# Altium PCB watch_PCB2.PcbDoc
Units mm, origin at the board's own origin, x right, y up, seen from the top; angles counter-clockwise.
Board outline 80 x 45 mm, 2 copper layers (Top Layer, Bottom Layer); 71 components, 49 nets, 254 pads, 73 vias.
Unrouted connection lines stored in the file: 6.
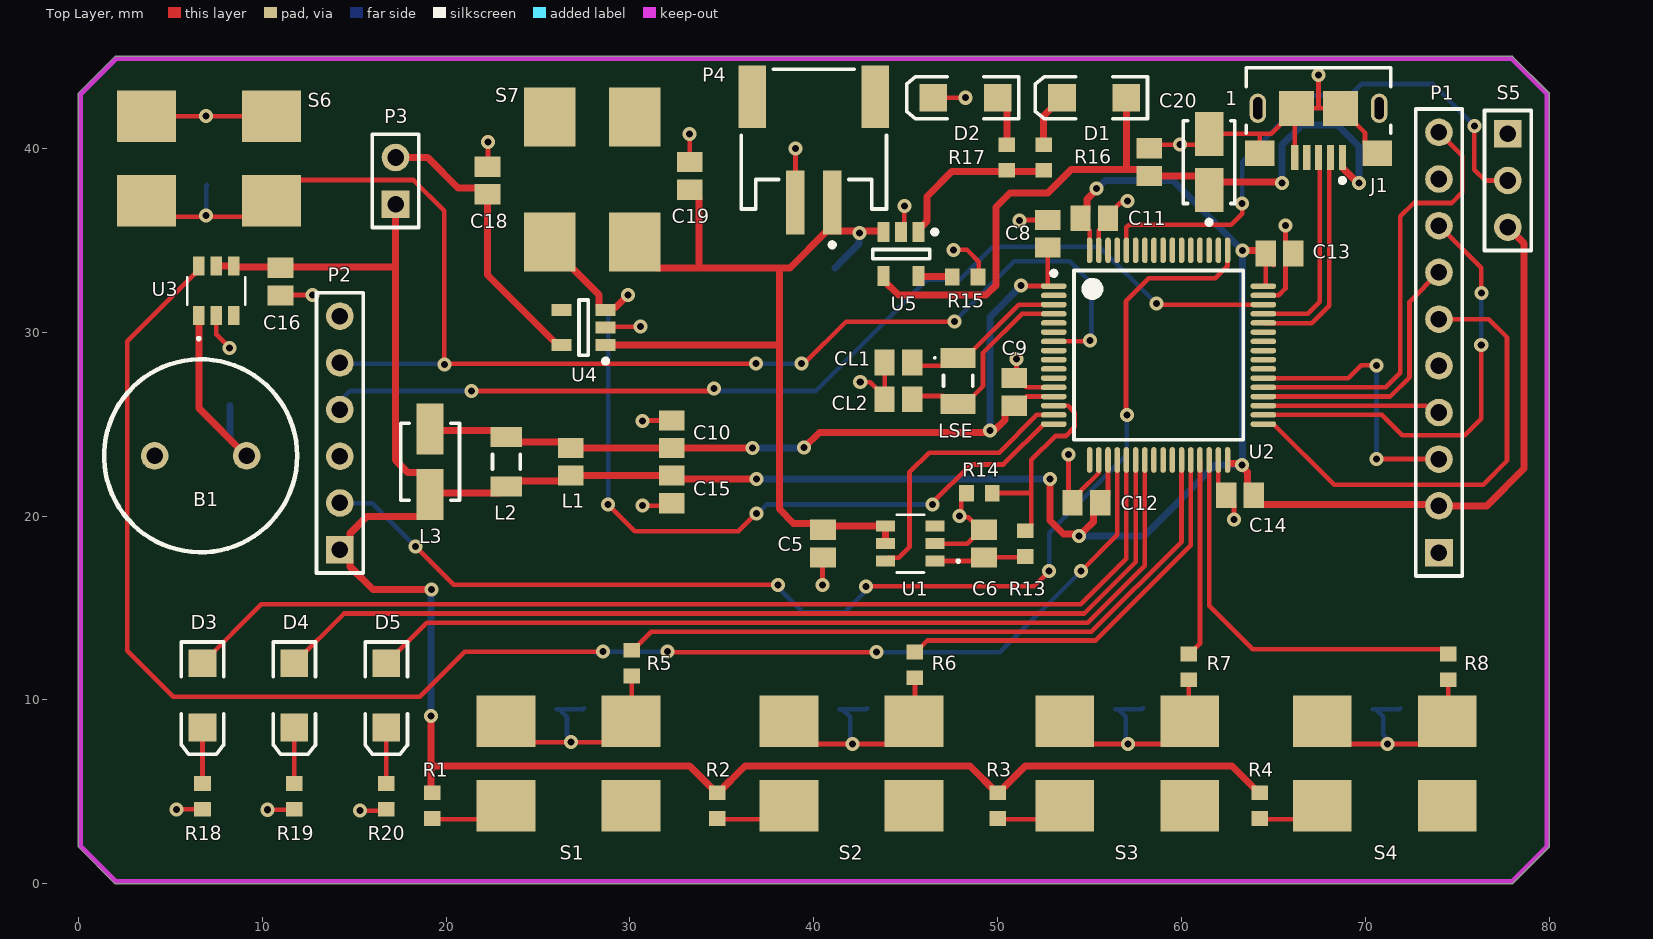
[diagram p0: Top Layer view]
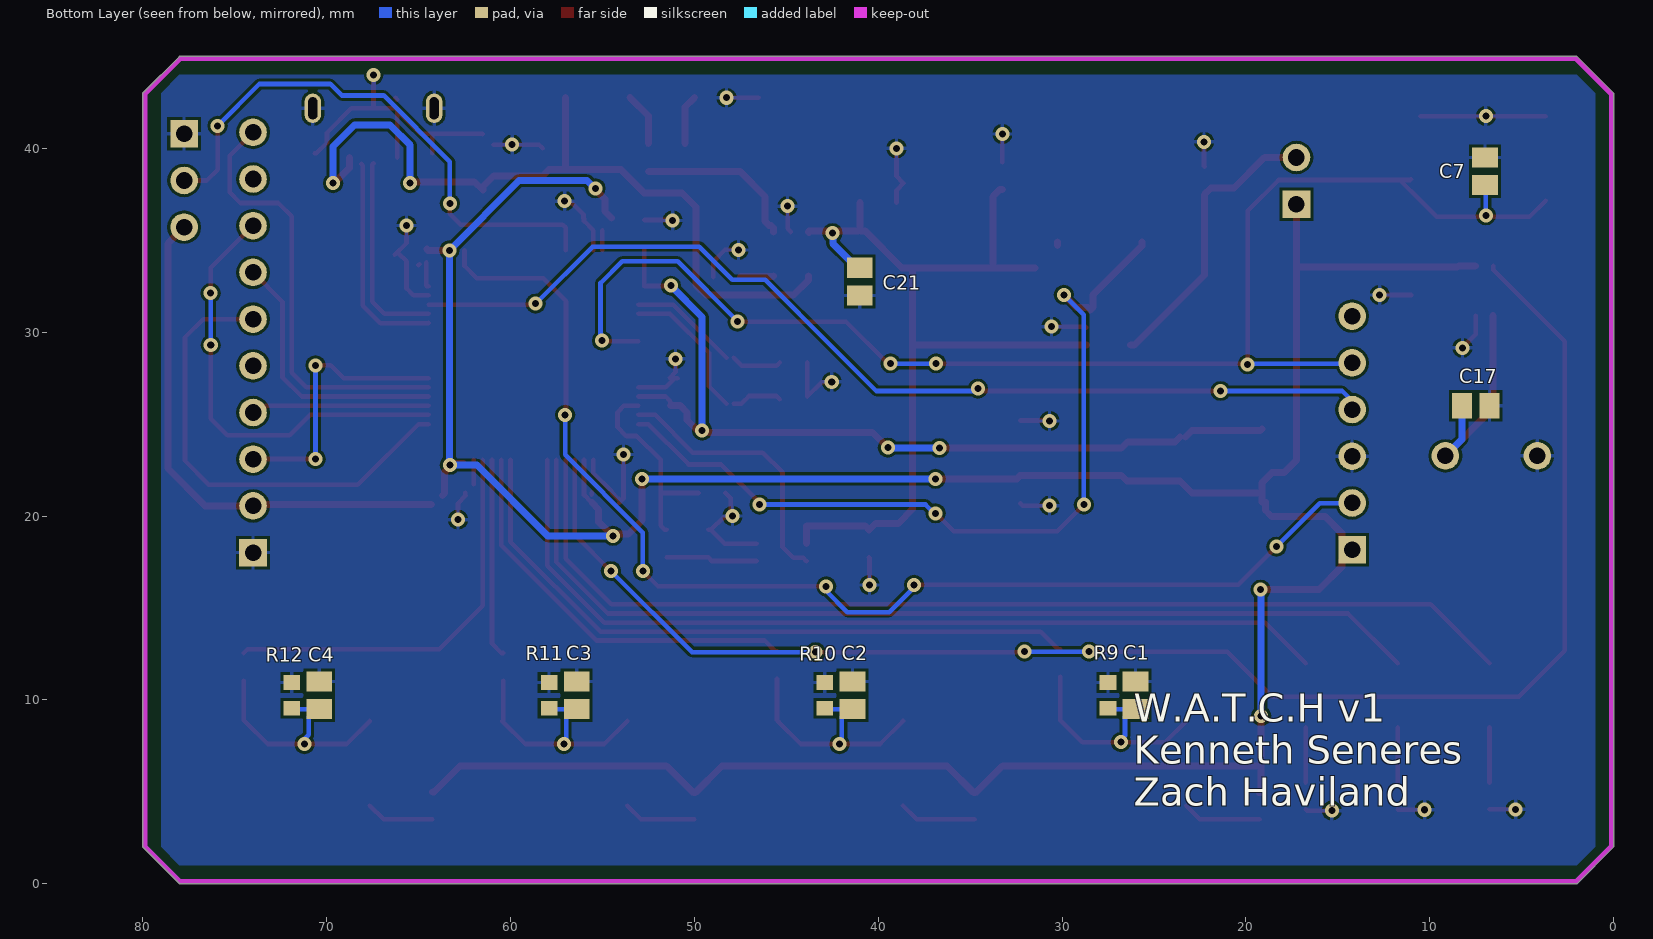
[diagram p1: Bottom Layer view, seen from below]

## Layer stack, top to bottom
Top Solder: solder mask 0.0102, Solder Resist, Dk 3.5
Top Layer: signal copper 0.0356
Dielectric 1: dielectric 0.32, FR-4, Dk 4.8
Bottom Layer: signal copper 0.0356
Bottom Solder: solder mask 0.0102, Solder Resist, Dk 3.5

## Board outline
0,2 2,0 78,0 80,2 80,43 78,45 2,45 0,43

## Design rules (kind name [scope] priority, off if disabled: settings)
BoardOutlineClearance [All] p1: gap=0.381 ignorepadtopadclearanceinfootprint=FALSE
Clearance [All] p1: gap=0.152 ignorepadtopadclearanceinfootprint=FALSE
ComponentClearance [All] p1: gap=0.025 collisioncheckmode=3 verticalgap=0.025 showdistances=FALSE
DiffPairsRouting [All] p1: maxlimit=10 minlimit=0.152 mostfreqgap=0.203 toplayer_minwidth=0.152 toplayer_maxwidth=0.381 toplayer_prefwidth=0.203 bottomlayer_minwidth=0.152 bottomlayer_maxwidth=0.381 bottomlayer_prefwidth=0.203 maxuncoupledlength=12.7
HoleSize [All] p1: absolutevalues=TRUE maxlimit=6.731 minlimit=0.33 maxpercent=80.000 minpercent=20.000
HoleToHoleClearance [All] p1: gap=0.254 allowstackedmicrovias=FALSE
MinimumAnnularRing [All] p1: minimumring=0.178
MinimumSolderMaskSliver [All] p1: minsoldermaskwidth=0
PlaneClearance [All] p1: clearance=0.254
PlaneConnect [All] p1: planeconnectstyle=Direct reliefexpansion=0.406 reliefentries=4 reliefconductorwidth=0.152 reliefairgap=0.152
PolygonConnect [All] p1: connectstyle=Relief reliefconductorwidth=0.203 reliefentries=4 polygonreliefangle="90 Angle" airgapwidth=0.152
RoutingCorners [All] p1: cornerstyle=45-Degree minsetback=1.25 maxsetback=1.25
RoutingVias RoutingVias_3 [IsVia] p1: holewidth=0.381 width=0.762 viastyle="Through Hole" minholewidth=0.381 minwidth=0.762 maxholewidth=0.381 maxwidth=0.762
RoutingVias RoutingVias_2 [IsVia] p2: holewidth=0.762 width=0.381 viastyle="Through Hole" minholewidth=0.762 minwidth=0.381 maxholewidth=0.762 maxwidth=0.381
RoutingVias RoutingVias_1 [IsVia] p3: holewidth=0.381 width=0.762 viastyle="Through Hole" minholewidth=0.711 minwidth=1.27 maxholewidth=0.711 maxwidth=1.27
RoutingVias [All] p4: holewidth=0.381 width=0.762 viastyle="Through Hole" minholewidth=0.33 minwidth=0.686 maxholewidth=2.54 maxwidth=2.896
SilkToSilkClearance [All] p1: silktosilkclearance=0
SilkToSolderMaskClearance [IsPad] p1: minsilkscreentomaskgap=0.152 clearancetoexposedcopper=TRUE
SolderMaskExpansion [All] p1: expansion=0.075 istentingtop=FALSE
Width [All] p1: maxlimit=10.16 minlimit=0.152 preferedwidth=0.203
20 further rules are at their usual default settings.

## Classes and differential pairs
component class power_supply: 1 C18 C19 C20 C21 D1 D2 J1 P3 P4 R15 R16 R17 S7 U4 U5
component class Motor_Driver_Schematic: B1 C16 C17 U3
component class MCU_Connections: C5 C6 C7 C8 C9 C10 C11 C12 C13 C14 C15 CL1 CL2 D3 D4 D5 L1 L2 L3 LSE P1 P2 R13 R14 R18 R19 R20 S5 S6 U1 U2 y
component class Button_connections: C1 C2 C3 C4 R1 R2 R3 R4 R5 R6 R7 R8 R9 R10 R11 R12 S1 S2 S3 S4
differential pair USB_D: +USB_D_P -USB_D_N

## Components (designator, comment, footprint, x,y, rotation, side; value= is the part's Value field where it differs from the comment)
1 "SMAJ5.0A-E3/5A" VISH-DO-214AC-2_N 61.5,39.25 r90 top
B1 "Motor: 316040004" RB5-10.5 6.65,23.275 r180 top
C1 "Cap" C0805 26,10.25 r270 bottom value=100nF
C2 "Cap" C0805 41.4,10.25 r270 bottom value=100nF
C3 "Cap" C0805 56.4,10.25 r270 bottom value=100nF
C4 "Cap" C0805 70.4,10.25 r270 bottom value=100nF
C5 "Cap" C0805 40.5,18.5 r90 top value=1uF
C6 "Cap" C0805 49.25,18.5 r270 top value=100nF
C7 "Cap" C0805 7,38.75 r90 bottom value=100nF
C8 "Cap" C0805 52.725,35.35 r270 top value=1uF
C9 "Cap" C0805 50.9,26.75 r270 top value=1uF
C10 "Cap" C0805 32.275,24.45 r270 top value=10nF
C11 "Cap" C0805 55.25,36.2 r180 top value=100nF
C12 "Cap" C0805 54.825,20.725 r0 top value=100nF
C13 "Cap" C0805 65.325,34.275 r180 top value=100nF
C14 "Cap" C0805 63.175,21.125 r0 top value=100nF
C15 "Cap" C0805 32.275,21.45 r90 top value=10uF
C16 "Cap" C0805 11,32.75 r90 top value=1uF
C17 "Cap" C0805 7.5,26 r0 bottom value=100nF
C18 "Cap" C0805 22.25,38.25 r270 top value=1uF
C19 "Cap" C0805 33.25,38.5 r270 top value=1uF
C20 "Cap" C0805 58.25,39.25 r270 top value=4.7uF
C21 "Cap" C0805 41,32.75 r90 bottom value=4.7uF
CL1 "Cap" C0805 44.6,28.35 r0 top value=TBD
CL2 "Cap" C0805 44.6,26.35 r0 top value=TBD
D1 "Orange LED" 3.2X1.6X1.1 55.25,42.75 r180 top
D2 "Green LED" 3.2X1.6X1.1 48.25,42.75 r180 top
D3 "Green LED" 3.2X1.6X1.1 6.75,10.25 r270 top
D4 "Orange LED" 3.2X1.6X1.1 11.75,10.25 r270 top
D5 "Green LED" 3.2X1.6X1.1 16.75,10.25 r270 top
J1 "10118193-0001LF" FCI-10118193-0001LF-5_V 67.45,40.825 r180 top
L1 "" C0805 26.775,22.95 r270 top
L2 "" C1206 23.275,22.95 r270 top
L3 "35F0121-0SR-10" LIRD-35F0121-0SR-10_V 19.125,22.95 r270 top
LSE "CM315D32768HZFT" CMHT-CM315D-2_V 47.85,27.35 r270 top
P1 "LCD receptile" HDR1X10 74,18.01 r90 top
P2 "SWD connecctor" HDR1X6 14.225,18.17 r90 top
P3 "Header 2" HDR1X2 17.25,36.96 r90 top
P4 "JST-PH connector" "JST- S2B-PH-SM4-TB(LF)(SN)-2_V" 40,40.5 r180 top
R1 "Res3" 1608[0603] 19.25,4.25 r90 top value=100
R2 "Res3" 1608[0603] 34.75,4.25 r90 top value=100
R3 "Res3" 1608[0603] 50,4.25 r90 top value=100
R4 "Res3" 1608[0603] 64.25,4.25 r90 top value=100
R5 "Res3" 1608[0603] 30.1,12 r270 top value=10k
R6 "Res3" 1608[0603] 45.5,11.9 r270 top value=10k
R7 "Res3" 1608[0603] 60.4,11.8 r270 top value=10k
R8 "Res3" 1608[0603] 74.5,11.8 r270 top value=10k
R9 "Res3" 1608[0603] 27.5,10.25 r270 bottom value=10k
R10 "Res3" 1608[0603] 42.9,10.25 r270 bottom value=10k
R11 "Res3" 1608[0603] 57.9,10.25 r270 bottom value=10k
R12 "Res3" 1608[0603] 71.9,10.25 r270 bottom value=10k
R13 "Res3" 1608[0603] 51.5,18.5 r270 top value=40K
R14 "Res3" 1608[0603] 49,21.25 r0 top value=100K
R15 "Res3" 1608[0603] 48.225,33 r180 top value=10K
R16 "Res3" 1608[0603] 52.5,39.5 r90 top value=470
R17 "Res3" 1608[0603] 50.5,39.5 r270 top value=470
R18 "Res3" 1608[0603] 6.75,4.75 r90 top value=470
R19 "Res3" 1608[0603] 11.75,4.75 r90 top value=470
R20 "Res3" 1608[0603] 16.75,4.75 r90 top value=470
S1 "SW-DPST" PCBComponent_1 27.85,7.75 r0 top
S2 "SW-DPST" PCBComponent_1 43.25,7.75 r0 top
S3 "SW-DPST" PCBComponent_1 58.25,7.75 r0 top
S4 "SW-DPST" PCBComponent_1 72.25,7.75 r0 top
S5 "SW-SPDT" HDR1X3 77.75,40.79 r270 top
S6 "SW-DPST" PCBComponent_1 5.9,38.25 r180 top
S7 "SW-DPST" PCBComponent_1 26.75,39.5 r90 top
U1 "Part Number: TPS22860DBVR" DBV0006A_N 45.25,18.5 r180 top value=Value
U2 "STM32L073RZT6" STM-LQFP64_M 58.75,28.75 r0 top
U3 "Part Number: TPS22860DBVR" DBV0006A_N 7.5,32.25 r90 top value=Value
U4 "LD39015M33R" SOT23-5L_N 27.475,30.25 r180 top
U5 "MCP73831T-2ATI/OT" SOT-23-OT5_N 44.75,34.25 r270 top

## Footprints (in the part's own frame and the unit in brackets; to place one, negate y for a bottom-side part, rotate by r counter-clockwise, add the part's x,y. Pads: shape width x height; smd on the part's side, far side on the other; paste and mask are expansions set on the pad)
3.2X1.6X1.1 [mm] "SMT LED; 2 Flat Leads"
  rect 1.5x1.5 smd: 1(-1.75,0) 2(1.75,0)
  silkscreen extent -2.9,-1.15 3.2,1.15
1608[0603] [mm] "Chip Capacitor, Body 1.6x0.8mm, IPC High Density"
  rect 0.8x0.9 smd: 1(-0.7,0) 2(0.7,0)
  body extent -0.87,-0.48 0.87,0.48, height 1.3
C0805 [mm] "Chip Capacitor, Body 2.0x1.3mm, IPC High Density"
  rect 1.1x1.4 smd: 1(-0.75,0) 2(0.75,0)
  body extent -1.1,-0.72 1.1,0.72, height 1.4
C1206 [mm] "Chip Capacitor, Body 3.2x1.6mm, IPC High Density"
  rect 1.1x1.7 smd: 1(-1.35,0) 2(1.35,0)
  silkscreen extent -0.4,-0.75 0.4,0.75, body extent -1.7,-0.9 1.7,0.9, height 1.3
CMHT-CM315D-2_V [mm] "SMD, 2-Leads, Body 1.60x3.30mm, Pitch 2.50mm"
  rect 1.1x1.9 smd: 1(-1.25,0) 2(1.25,0)
  silkscreen extent -1.3,-1.32 0.3,0.8, body extent -1.65,-0.8 1.65,0.8, height 0.9
DBV0006A_N [mil]
  rect 41x24 smd paste+0 mask+3: 1(-53.15,37.4) 2(-53.15,0) 3(-53.15,-37.4) 4(53.15,-37.4) 5(53.15,0) 6(53.15,37.4)
  silkscreen extent -105,-62 29,62, body extent 0,0 10,10, height 10
FCI-10118193-0001LF-5_V [mm] "Micro, USB-B, 5-Leads, Body 7.86x5.05mm, Pitch 0.65 mm"
  rect 0.4x1.35 smd: 1(-1.3,1.325) 2(-0.65,1.325) 3(0,1.325) 4(0.65,1.325) 5(1.3,1.325)
  rect 1.6x1.4 smd: 6(-3.2,1.1) 7(3.2,1.1)
  rect 1.9x1.9 smd: 8(-1.2,-1.35) 9(1.2,-1.35)
  oval 0.9x1.6 hole 0.5 slot 1.2 at 90 deg: 10(-3.3,-1.35) 11(3.3,-1.35)
  silkscreen extent -3.93,-3.55 3.93,2.7, body extent -3.93,-4.16 3.93,1.5, height 2.83
HDR1X2 [mm] "Connector; Header; 2 Position"
  rect 1.5x1.5 hole 0.9: 1(0,0)
  round 1.5 hole 0.9: 2(2.54,0)
  silkscreen extent -1.27,-1.27 3.81,1.27
HDR1X3 [mm] "Connector; Header; 3 Position"
  rect 1.5x1.5 hole 0.9: 1(0,0)
  round 1.5 hole 0.9: 2(2.54,0) 3(5.08,0)
  silkscreen extent -1.27,-1.27 6.35,1.27
HDR1X6 [mm] "Connector; Header; 6 Position"
  rect 1.5x1.5 hole 0.9: 1(0,0)
  round 1.5 hole 0.9: 2(2.54,0) 3(5.08,0) 4(7.62,0) 5(10.16,0) 6(12.7,0)
  silkscreen extent -1.27,-1.27 13.97,1.27
HDR1X10 [mm] "Connector; Header; 10 Position"
  rect 1.5x1.5 hole 0.9: 1(0,0)
  round 1.5 hole 0.9: 2(2.54,0) 3(5.08,0) 4(7.62,0) 5(10.16,0) 6(12.7,0) 7(15.24,0) 8(17.78,0) 9(20.32,0) 10(22.86,0)
  silkscreen extent -1.27,-1.27 24.13,1.27
"JST- S2B-PH-SM4-TB(LF)(SN)-2_V" [mm] "SMD, 2-Leads, Body 7.9x7.6mm, Pitch 2mm"
  rect 1x3.5 smd: 1(-1,3.45) 2(1,3.45)
  rect 1.5x3.4 smd: MP1(-3.35,-2.3) MP2(3.35,-2.3)
  silkscreen extent -3.95,-3.8 3.95,5.87, body extent -3.95,-3.8 3.95,4.8, height 5.6
LIRD-35F0121-0SR-10_V [mm] "Molded Inductor, 2-Leads, Body 4.16x3.13mm"
  rect 2.77x1.47 smd: 1(-1.79,0) 2(1.79,0)
  silkscreen extent -2.1,-1.6 2.1,1.6, body extent -2.3,-1.56 2.3,1.57, height 3.05
PCBComponent_1 [mm]
  rect 3.2x2.8 smd: 1(-4.6,1.1) 2(2.2,-3.5) 3(2.2,1.1) 4(-4.6,-3.5)
RB5-10.5 [mm] "Capacitor (Radial); 2 Leads"
  round 1.5 hole 0.9: 1(-2.5,0) 2(2.5,0)
  silkscreen extent -5.25,-5.25 5.25,5.25
SOT23-5L_N [mm] "SOT23, 5-Leads, Body 2.9x1.6mm, Pitch 0.95mm, Lead Span 2.8mm, IPC Medium Density"
  rect 1.1x0.65 smd: 1(-1.2,0.95) 2(-1.2,0) 3(-1.2,-0.95) 4(1.2,-0.95) 5(1.2,0.95)
  silkscreen extent -1.33,-1.5 0.25,1.95, body extent -0.87,-1.5 0.87,1.5, height 1.45
SOT-23-OT5_N [mm] "SOT23, 5-Leads, Body 2.9x1.7mm, Pitch 0.95mm, Lead Span 2.8mm, IPC Medium Density"
  rect 1.1x0.65 smd: 1(-1.2,0.95) 2(-1.2,0) 3(-1.2,-0.95) 4(1.2,-0.95) 5(1.2,0.95)
  silkscreen extent -1.32,-1.55 0.25,1.95, body extent -0.9,-1.55 0.9,1.55, height 1.45
STM-LQFP64_M [mm] "QFP, 64-Leads, Body 10x10mm, Pitch 0.5mm, IPC Low Density"
  oval 1.4x0.3 smd: 1(-5.7,3.75) 2(-5.7,3.25) 3(-5.7,2.75) 4(-5.7,2.25) 5(-5.7,1.75) 6(-5.7,1.25) 7(-5.7,0.75) 8(-5.7,0.25) 9(-5.7,-0.25) 10(-5.7,-0.75) 11(-5.7,-1.25) 12(-5.7,-1.75) 13(-5.7,-2.25) 14(-5.7,-2.75) 15(-5.7,-3.25) 16(-5.7,-3.75) 33(5.7,-3.75) 34(5.7,-3.25) 35(5.7,-2.75) 36(5.7,-2.25) 37(5.7,-1.75) 38(5.7,-1.25) 39(5.7,-0.75) 40(5.7,-0.25) 41(5.7,0.25) 42(5.7,0.75) 43(5.7,1.25) 44(5.7,1.75) 45(5.7,2.25) 46(5.7,2.75) 47(5.7,3.25) 48(5.7,3.75)
  oval 0.3x1.4 smd: 17(-3.75,-5.7) 18(-3.25,-5.7) 19(-2.75,-5.7) 20(-2.25,-5.7) 21(-1.75,-5.7) 22(-1.25,-5.7) 23(-0.75,-5.7) 24(-0.25,-5.7) 25(0.25,-5.7) 26(0.75,-5.7) 27(1.25,-5.7) 28(1.75,-5.7) 29(2.25,-5.7) 30(2.75,-5.7) 31(3.25,-5.7) 32(3.75,-5.7) 49(3.75,5.7) 50(3.25,5.7) 51(2.75,5.7) 52(2.25,5.7) 53(1.75,5.7) 54(1.25,5.7) 55(0.75,5.7) 56(0.25,5.7) 57(-0.25,5.7) 58(-0.75,5.7) 59(-1.25,5.7) 60(-1.75,5.7) 61(-2.25,5.7) 62(-2.75,5.7) 63(-3.25,5.7) 64(-3.75,5.7)
  silkscreen extent -5.82,-4.6 4.6,4.6, body extent -5,-5 5,5, height 1.6
VISH-DO-214AC-2_N [mm] "DO-214AC, 2-Leads, Body 4.5x2.79mm, IPC Medium Density"
  rect 2.4x1.55 smd: 1(-1.525,0) 2(1.525,0)
  silkscreen extent -3.4,-1.4 2.25,1.4, body extent -2.25,-1.4 2.25,1.39, height 2.29

## Part data
1: library part CMP-0548-00320-2, "Transient Voltage Suppressor, 6.40 to 231 V, 5 V Stand-off Voltage, Uni-Directional, -55 to 155 degC, 2-pin DO-214AC, Pb-Free, Tape and Reel", Manufacturer="Vishay Semiconductor", Operating Junction and Storage Temperature Range="-55 to 150 degC", ComponentLink1Description="Manufacturer URL", ComponentLink1URL=http://www.vishay.com/, ComponentLink2Description=Datasheet, ComponentLink2URL=http://www.vishay.com/docs/88390/smaj50a.pdf, ComponentLink3Description="Package Specification", ComponentLink3URL=http://www.vishay.com/docs/88390/smaj50a.pdf, DatasheetVersion=12/8/2013, ID (uA)=800, IFSM="40 A", Mounting Technology="Surface Mount", PackageDescription="2-Pin DO-214AC (SMA), Body 4.245 x 2.665 mm", PackageReference=DO-214AC-2, Packing="Tape and Reel", PartNumber=SMAJ5.0A-E3/5A, PPPM (W)="400, 300", RoHS=TRUE, VBR Uni-Directional (V)="6.4 to 231", VWM (V)=5
B1: library part Motor, "Motor, General Kind", LatestRevisionDate=17-Jul-2002, LatestRevisionNote="Re-released for DXP Platform.", PackageDescription="Capacitor (Radial); 2 Leads", PackageReference=RB5-10.5, Published=24-Mar-1999, Publisher="Altium Limited"
C1 C2 C3 C4 C5 C6 C7 C8 C9 C10 C11 C12 C13 C14 C15 C16 C17 C18 C19 C20 C21 CL1 CL2: "Capacitor", LatestRevisionDate=17-Jul-2002, LatestRevisionNote="Re-released for DXP Platform.", PackageDescription="Radial Cap, Thru-Hole; 2 Leads; 0.3 in Pin Spacing", PackageReference=RAD-0.3, Published=8-Jun-2000, Publisher="Altium Limited"
D1 D2 D3 D4 D5: library part LED2, "Typical RED, GREEN, YELLOW, AMBER GaAs LED", LatestRevisionDate=17-Jul-2002, LatestRevisionNote="Re-released for DXP Platform.", PackageDescription="SM LED; 2 Flat Leads", PackageReference=3.2X1.6X1.1, PackageVersion=Feb-2002, Published=8-Jun-2000, Publisher="Altium Limited"
J1: library part CMP-2000-05119-1, "Micro USB B Type Receptacle, -55 to 85 degC, 5-Pin SMD, RoHS, Tape and Reel", Color=Black, Current Rating=1.8A, Flammability Rating=UL94V-0, Insulation Resistance=1000MOhms, Manufacturer=FCI, Operating Temperature Range=-55Cto+85C, Brand=FCI, Connector Type=MicroUSBTypeBreceptacle, Contact Material=CopperAlloy, Contact Plating=Gold, Datasheet URL=http://datasheet.octopart.com/10118193-0001LF-FCI-datasheet-55953155.pdf, Datasheet Version="Rev. C, 05/2015", Factory Pack Quantity=1200, Gender=Female, Manufacturer URL=http://www.fci.com/, Mounting Angle=Right, Number of Contacts=5Contact, Packaging=Reel, Product=MicroUSBTypeBConnectors, Product Category=USBConnectors, RoHS=Details, Standard=USB2.0, Termination Style=SMD/SMT
L1 L2: library part Inductor, "Inductor", Code_IEC=1005, Code_JEITA=0402, LatestRevisionDate=29-May-2009, LatestRevisionNote="IPC-7351 Footprint Added.", PackageDescription="Chip Inductor", PackageReference=0402-A, Published=8-Jun-2000, Publisher="Altium Limited"
L3: library part CMP-2000-05596-1, "EMI Filtering & RF Inductor, 10 A, 0.75 mOhm, -40 to 125 degC, 2-Pin SMD, RoHS, Tape and Reel", Current Rating (Max)=10A, DC Resistance (DCR) (Max)=0.75mOhm, Impedance @ Frequency=41Ohm@100MHz, Manufacturer=Laird, Operating Temperature=-40°C~125°C, Package / Case=2-SMD,J-Lead, Package Description="2-Pin Surface Mount Device, Body 4.06 x 3.05 mm", Ratings=-, Standard Package=1, Catalog Drawings=(28,35)F0121-0SR-10, Category=Filters, Datasheet URL=https://assets.lairdtech.com/home/brandworld/files/35F0121-0SR-10.pdf, Datasheet Version="Rev. F, 04/2015", Family=FerriteBeadsandChips, Filter Type=PowerLine, Kits=240-2227-ND-KITEMIFERRITEBEADCHIPSMD, Manufacturer URL=https://www.lairdtech.com/, Mounting Technology=SurfaceMount, Mounting Type=SurfaceMount, Number of Lines=1, Online Catalog=ChipBeads-PowerFiltering, Other Names=240-2520-1, Package Reference=35F0121-0SR-10, Package URL=http://cdn.lairdtech.com/home/brandworld/files/35F0121-0SR-10.pdf, Packaging=CutTape(CT), Series=35
LSE: library part CMP-2000-05089-1, "Turning Fork Crystal Unit, 32.768 KHz, -40 to 85 degC, 2-Pin SMD, RoHS, Tape and Reel. Note: Part from altium library is a DZFT, renamed to HZFT to reflect part that's actually going to be used", Manufacturer="Citizen Micro HumanTech", Package Description="2-Pin Surface Mount Device, Body 1.6 x 3.3 mm, Pitch 2.5 mm", Package Reference=CM315D-2, Package Version="Rev. 1.4, 09/2012", Datasheet URL=http://cfm.citizen.co.jp/english/product/pdf/CM315D.pdf, Datasheet Version="Rev. 1.4, 09/2012", Manufacturer URL=http://www.citizen-systems.com/us/start, Package URL=http://cfm.citizen.co.jp/english/product/pdf/CM315D.pdf
P1: library part "Header 10", "Header, 10-Pin", LatestRevisionDate=17-Jul-2002, LatestRevisionNote="Re-released for DXP Platform.", Publisher="Altium Limited"
P2: library part "Header 6", "Header, 6-Pin", LatestRevisionDate=17-Jul-2002, LatestRevisionNote="Re-released for DXP Platform.", Publisher="Altium Limited"
P3: "Header, 2-Pin", LatestRevisionDate=17-Jul-2002, LatestRevisionNote="Re-released for DXP Platform.", Publisher="Altium Limited"
P4: library part CMP-1755-00001-1, "Male Header, Pitch 2 mm, 1 x 2 Position, Height 5.5 mm, -25 to 85 degC, RoHS, Tape and Reel", Colour=Black, Current Rating="3 A", Max Operating Temperature=105degC, Min Operating Temperature=-65degC, Package Quantity=100, ComponentLink1Description="Manufacturer URL", ComponentLink1URL=http://www.jst.com/home2.html, ComponentLink2Description=Datasheet, ComponentLink2URL=http://www.jst-mfg.com/product/pdf/eng/ePH.pdf, Contact Finish=Lead, Contact Material=Bronze, Contact Plating=Tin, DatasheetVersion=Dec-12, Height="8.13 mm", Lead Pitch="0.1 inch", Length="101.19 mm", Mount="Through Hole", PackageDescription="Male Header, Pitch 2 mm, 1 x 2 Position, Height 5.5 mm", PackageReference=S2B-PH-SM4-TB(LF)(SN)-2, Packaging=Bulk, Pins=40, Radiation Hardening=No, RoHSCompliant=True, Width="2.34 mm"
R1 R2 R3 R4 R5 R6 R7 R8 R9 R10 R11 R12 R13 R14 R15 R16 R17 R18 R19 R20: "Resistor", LatestRevisionDate=29-May-2009, LatestRevisionNote="IPC-7351 Footprint Added.", PackageDescription="Chip Resistor", PackageReference=J1-0603, Published=8-Jun-2000, Publisher="Altium Limited"
S1 S2 S3 S4 S6 S7: "Double-Pole, Single-Throw Switch", LatestRevisionDate=17-Jul-2002, LatestRevisionNote="Re-released for DXP Platform.", PackageDescription="Switch; 4 Leads", PackageReference=DPST-4, Published=24-Mar-1999, Publisher="Altium Limited"
S5: "SPDT Subminiature Toggle Switch, Right Angle Mounting, Vertical Actuation", ComponentLink1Description="Manufacturer Link", ComponentLink1URL=http://www.apem.com, DatasheetVersion=05-Dec-2000, LatestRevisionDate=17-Dec-2003, LatestRevisionNote="Schematic revised, PCB Footprint replaced.", PackageDescription="Switch; 4 Leads", PackageReference=TL36WW15050, Published=24-Mar-1999, Publisher="Altium Limited"
U1 U3: library part TPS22860DBVR, "No Description Available", Manufacturer="Texas Instruments", Built_By=Texas_Instrument_Team, CompType=IC, Copyright="Copyright (C) 2018 Accelerated Designs. All rights reserved", Manufacturer_Part_Number=TPS22860DBVR, MountType=SMT, PackageReference=DBV0006A, PartNumber=TPS22860DBVR, RefDes=RefDes, RoHS=Y, Type=DEV, Vendor="Texas Instruments"
U2: library part CMP-1546-00073-1, "Ultra-Low-Power ARM Cortex-M0+ MCU, 192 KB Flash, 20 KB Internal RAM, 51 I/Os, 64-Pin LQFP, -40 to 85 degC, Tray", I/Os (High Current)=51, Operating Frequency(F) (Processor speed) (MHz)=32, Package Description="64-Pin Low-profile Quad Flat Package, Body 10 x 10 mm, Pitch 0.5 mm", Package Reference=LQFP64, Supply Voltage(Vcc) min (V)=1.8, ComponentLink1Description="Manufacturer URL", ComponentLink1URL=http://www.st.com/, ComponentLink2Description=Datasheet, ComponentLink2URL=http://www.st.com/st-web-ui/static/active/en/resource/technical/document/datasheet/DM00141036.pdf, Core="ARM Cortex-M0+", D/A Converter=2, Data E2PROM nom (B)=6144, DatasheetVersion="Rev. 2", FLASH Size (Prog) (kB)=192, Internal RAM Size (kB)=20, Mounting Technology="Surface Mount", Packing=Tray
U4: library part CMP-0244-00351-1, "150 mA Low Quiescent Current Low Noise Voltage Regulator, 3.3V, 5-Pin SOT-23, Tape and Reel", ComponentLink1Description="Manufacturer URL", ComponentLink1URL=http://www.st.com, ComponentLink2Description=Datasheet, ComponentLink2URL=http://www.st.com/internet/com/TECHNICAL_RESOURCES/TECHNICAL_LITERATURE/DATASHEET/CD00173477.pdf, DatasheetVersion=1/02/2009, PackageDescription="5-Pin SOT-23 Package, 2.9 x 1.6 mm Body, 0.95 mm Pitch, 2.8 mm Lead Span", PackageReference=SOT23-5L, PackageVersion=1/01/2008
U5: library part CMP-0133-00144-1, "Miniature Single-Cell, Fully Integrated Li-Ion, Li-Polymer Charge Management Controller, 4.2V, 5-Pin SOT-23, Industrial Temperature, Tape and Reel", Code_IPC=SOT23-5, DatasheetVersion="revE, Sep-2008", PackageDescription="5-Lead Plastic Small Outline Transistor (OT) [SOT-23]", PackageReference=SOT-23-OT5, PackageVersion="revBB, Aug-2009"

## Via types
v1: diameter 0.762, hole 0.381, Top Layer to Bottom Layer, tented both sides, 73 vias

## Nets (pads, with @x,y where several pads share a name; then routed paths per layer and width w, separated by ;. In a path a pad name is that pad's centre, name@x,y a point inside that pad or via, vN(x,y) a via of type N, cw(c..) or ccw(c..) an arc to the next point about the centre after c; other vN are vias at no path point)
ADC_Enable: U1.6 U2.15 | length 14.8
  Top Layer w0.254: U1.6 44.078,17.728 44.628,17.728 45.2,18.3 45.2,22.375 46.275,23.45 50.075,23.45 52.125,25.5 U2.15
ADC_IN0: R13.1 R14.2 U2.14 | length 11.2
  Top Layer w0.254: R14.2@49.75,21.25 51.825,21.25 ; R13.1@51.5,19.25 51.6,19.25 51.823,19.473 51.823,19.573 51.825,19.575 51.825,21.25 ; U2.14 53.059,25.991 53.834,25.991 54.175,25.65 54.175,24.825 53.7,24.35 53.125,24.35 51.825,23.05 51.825,21.25
Backlight: P1.10 U2.37 | length 24
  Top Layer w0.254: U2.37 71.1,27 71.9,27.8 71.9,36.3 72.625,37.025 74.7,37.025 75.275,37.6 75.275,39.595 P1.10
BOOT0: S5.2 U2.60 | length 30.5
  Top Layer w0.254: U2.60 57,35.701 57.149,35.85 62.7,35.85 63.3,36.45 v1(63.3,37) ; v1(75.925,41.225) 75.925,38.835 76.51,38.25 S5.2
  Bottom Layer w0.254: v1(63.3,37) 63.3,39.275 66.9,42.875 69.175,42.875 69.8,43.5 73.65,43.5 v1(75.925,41.225)
D/C: P1.4 U2.35 | length 9.7
  Top Layer w0.254: U2.35 73.293,26 73.663,25.63 P1.4
"Debug LED 1": D3.1 U2.21 | length 58
  Top Layer w0.254: D3.1 9.95,15.2 54.525,15.2 57,17.675 U2.21
"Debug LED 2": D4.1 U2.22 | length 53.6
  Top Layer w0.254: D4.1 14.45,14.7 54.7,14.7 57.5,17.5 U2.22
"Debug LED 3": D5.1 U2.23 | length 49.2
  Top Layer w0.254: D5.1 18.95,14.2 54.9,14.2 58,17.3 U2.23
GND: 1.2 B1.2 C1.1 C2.1 C3.1 C4.1 C5.1 C6.1 C7.2 C8.1 C9.1 C10.1 C11.1 C12.1 C13.1 C14.1 C15.1 C16.1 C17.1 C18.1 C19.1 C20.1 C21.1 CL1.1 CL2.1 D2.2 J1.5 J1.6 J1.7 J1.8 J1.9 J1.10 J1.11 P1.1 P2.3 P4.2 R9.1 R10.1 R11.1 R12.1 R14.1 R15.1 R18.1 R19.1 R20.1 S5.1 S6.2 S6.4 U1.2 U2.12 U2.18 U2.31 U2.47 U2.63 U3.2 U4.2 U5.2 | length 84.7
  Top Layer w0.254: S6.2 v1(6.95,41.75) S6.4 ; v1(5.325,4.05) R18.1 ; U3.2 7.5,29.875 v1(8.225,29.15) ; v1(10.275,4.025) 11.725,4.025 R19.1 ; C16.1 11.025,32.025 v1(12.725,32.025) ; v1(15.325,3.975) 16.675,3.975 R20.1 ; C18.1 22.275,39.025 v1(22.275,40.35) ; U4.2 28.725,30.3 v1(30.575,30.3) ; v1@30.54,25.166 30.573,25.2 C10.1 ; v1(30.677,20.564) 32.139,20.564 C15.1 ; C19.1 v1(33.25,40.775) ; P4.2 39,37.727 38.627,38.1 39,38.473 v1(39,40) ; v1(40.475,16.25) 40.475,17.725 C5.1 ; v1(42.525,27.3) 42.543,27.282 43.068,27.282 43.85,26.5 CL1.1 ; U5.2 44.925,35.625 v1(44.925,36.85) ; D2.2 v1(48.256,42.75) ; U1.2 48.35,18.5 C6.1@49.1,19.25 ; v1(47.6,34.475) 48.331,34.475 48.975,33.831 R15.1@48.975,33 ; R14.1 48.027,20.977 48.027,20.102 v1(47.925,20) 47.984,19.941 48.409,19.941 C6.1@49.1,19.25 ; C6.1 C6.1@49.1,19.25 ; C9.1 51.05,27.5 51.55,27 U2.12 ; v1(51.025,28.55) 51.025,27.819 51.322,27.522 C9.1@51.3,27.5 ; v1(51.174,36.072) 51.202,36.1 C8.1 ; v1(53.85,23.35) 53.85,20.95 C12.1 ; C12.1@54.075,20.925 54.125,20.925 54.498,21.298 54.498,21.348 55.491,22.341 55.491,23.041 U2.18 ; U2.63 55.5,35.55 56,36.05 C11.1 ; C11.1@56.025,36.2 56.025,36.375 56.678,37.028 56.953,37.028 v1(57.05,37.125) ; C20.1 58.448,40.198 v1(59.903,40.198) 1.2@60.923,40.198 ; 1.2 61.525,40.8 64.25,40.8 ; C14.1@62,21.725 U2.31 ; C14.1 62.85,20.7 v1(62.85,19.8) ; C14.1@62.45,21.125 C14.1@62.45,21.275 ; J1.7 64.25,40.8 ; U2.47 65.275,32 65.65,32.375 65.65,33.553 65.652,33.555 65.652,33.852 C13.1 ; v1(65.65,35.8) 65.65,34.85 C13.1@66.286,34.214 ; J1.5 J1.9@66.15,42.075 ; J1.9@66.15,42.65 J1.9@66.25,42.75 ; v1(67.438,43.988) 67.45,43.975 67.45,42.175 ; J1.6 70.55,39.725 69.977,40.298 69.977,40.848 J1.8 67.45,42.175 ; 64.25,40.8 64.875,40.8 J1.9@66.15,42.075 ; J1.9@66.15,42.075 J1.9 67.45,42.175
  other v1: 30.677,25.166
LCD_Reset: P1.3 U2.38 | length 14.9
  Top Layer w0.254: U2.38 69.075,27.5 69.775,28.2 v1(70.6,28.2) ; v1(70.6,23.1) 73.99,23.1 P1.3
  Bottom Layer w0.254: v1(70.6,23.1) v1(70.6,28.2)
MOSI: P1.7 U2.36 | length 14.7
  Top Layer w0.254: U2.36 71.35,26.5 72.4,27.55 72.4,31.65 P1.7
Net1_1: 1.1 C20.2 D1.1 J1.1 U5.4 | length 43.3
  Top Layer w0.381: U5.4 43.8,32.825 44.6,32.025 49.375,32.025 49.9,32.55 49.9,36.8 50.675,37.575 52.725,37.575 54,38.85 57.025,38.85 ; D1.1 57,38.875 57.025,38.85 ; v1(65.45,38.1) 65.375,38.175 61.95,38.175 1.1 61.5,37.915 60.915,38.5 C20.2 57.9,38.85 57.025,38.85 ; J1.1 68.759,39.491 68.759,38.941 69.6,38.1 v1(69.65,38.1)
  Bottom Layer w0.381: v1(65.45,38.1) 65.45,40.175 66.55,41.275 68.481,41.275 69.65,40.106 v1(69.65,38.1)
NetB1_1: B1.1 C17.2 U3.1 | length 11.8
  Top Layer w0.381: U3.1 6.55,25.875 B1.1
  Bottom Layer w0.381: C17.2 8.25,24.175 B1.1
NetC1_2: C1.2 R5.2 R9.2 S1.1 S1.3 | length 13.8
  Top Layer w0.254: S1.1 24.4,7.7 v1(26.8,7.7) 28.9,7.7 S1.3 30.1,8.9 R5.2@30.1,11.25
  Bottom Layer w0.254: C1.2 C1.2@26.15,9.5 ; v1(26.8,7.7) 26.8,7.837 26.575,8.062 26.575,8.928 26.573,8.93 26.573,9.077 C1.2@26.15,9.5 ; R9.2 27.45,9.5 C1.2@26.15,9.5
NetC2_2: C2.2 R6.2 R10.2 S2.1 S2.3 | length 13.8
  Top Layer w0.254: S2.1 39.9,7.6 v1(42.1,7.6) 44.2,7.6 S2.3 45.5,8.9 R6.2@45.5,11.15
  Bottom Layer w0.254: C2.2 C2.2@41.55,9.5 ; v1(42.1,7.6) 41.973,7.727 41.973,9.077 C2.2@41.55,9.5 ; R10.2 42.85,9.5 C2.2@41.55,9.5
NetC3_2: C3.2 R7.2 R11.2 S3.1 S3.3 | length 13.7
  Top Layer w0.254: S3.1 54.9,7.6 v1(57.1,7.6) 59.2,7.6 S3.3 60.4,8.9 R7.2@60.4,11.05
  Bottom Layer w0.254: C3.2 C3.2@56.55,9.5 ; v1(57.1,7.6) 56.973,7.727 56.973,9.077 C3.2@56.55,9.5 ; R11.2 57.85,9.5 C3.2@56.55,9.5
NetC4_2: C4.2 R8.2 R12.2 S4.1 S4.3 | length 13.7
  Top Layer w0.254: S4.1 68.9,7.6 v1(71.2,7.6) 73.2,7.6 S4.3 74.5,8.9 R8.2@74.5,11.05
  Bottom Layer w0.254: C4.2 C4.2@70.55,9.5 ; v1(71.2,7.6) 71.2,7.875 70.973,8.102 70.973,9.077 C4.2@70.55,9.5 ; R12.2 71.85,9.5 C4.2@70.55,9.5
NetC6_2: C6.2 R13.2 U1.1 | length 5
  Top Layer w0.254: U1.1 49.05,17.55 C6.2 R13.2@51.5,17.75
NetC18_2: C18.2 P3.2 U4.5 | length 15.8
  Top Layer w0.381: P3.2 19,39.5 20.65,37.85 21.9,37.85 C18.2 22.25,33.1 25.915,29.435 26.05,29.3 U4.5
NetCL1_2: CL1.2 LSE.1 U2.3 | length 8.7
  Top Layer w0.254: CL1.2 45.525,28.175 46.878,28.175 46.88,28.177 47.427,28.177 LSE.1 ; LSE.1@48.25,28.6 51.15,31.5 U2.3
NetCL2_2: CL2.2 LSE.2 U2.4 | length 10.6
  Top Layer w0.254: CL2.2 45.525,26.525 47.025,26.525 47.45,26.1 LSE.2 ; LSE.2@48.25,26.1 49.2,27.05 49.2,28.875 51.325,31 U2.4
NetD1_2: D1.2 R16.2 | length 2.9
  Top Layer w0.381: R16.2@52.5,40.25 52.5,41.75 D1.2
NetD2_1: D2.1 R17.1 | length 2.7
  Top Layer w0.381: D2.1 50.5,42.25 R17.1@50.5,40.25
NetD3_2: D3.2 R18.2 | length 3
  Top Layer w0.254: R18.2@6.75,5.5 D3.2
NetD4_2: D4.2 R19.2 | length 3
  Top Layer w0.254: R19.2@11.75,5.5 D4.2
NetD5_2: D5.2 R20.2 | length 3
  Top Layer w0.254: R20.2@16.75,5.5 D5.2
NetR1_1: R1.1 S1.2 S1.4 | length 4.3
  Top Layer w0.254: R1.1@19.25,3.5 22.5,3.5 S1.4
NetR2_1: R2.1 S2.2 S2.4 | length 4.2
  Top Layer w0.254: R2.1@34.75,3.5 37.9,3.5 S2.4
NetR3_1: R3.1 S3.2 S3.4 | length 4
  Top Layer w0.254: R3.1@50,3.5 52.9,3.5 S3.4
NetR4_1: R4.1 S4.2 S4.4 | length 3.7
  Top Layer w0.254: R4.1@64.25,3.5 66.9,3.5 S4.4
NetR5_1: R5.1 U2.27 | length 36.8
  Top Layer w0.254: R5.1@30.1,12.75 30.2,12.75 31.15,13.7 55.1,13.7 60,18.6 U2.27
NetR6_1: R6.1 U2.28 | length 22
  Top Layer w0.254: R6.1@45.5,12.65 45.6,12.65 46.182,13.232 55.332,13.232 60.5,18.4 U2.28
NetR7_1: R7.1 U2.29 | length 10.8
  Top Layer w0.254: R7.1@60.4,12.55 60.5,12.55 61,13.05 U2.29
NetR8_1: R8.1 U2.30 | length 22
  Top Layer w0.254: U2.30 61.5,15.125 63.875,12.75 74.3,12.75 R8.1@74.5,12.55
NetR15_2: R15.2 U5.5 | length 1.8
  Top Layer w0.381: U5.5 45.725,33.025 47.45,33.025 R15.2@47.475,33
NetR16_1: R16.1 R17.2 U5.1 | length 9.1
  Top Layer w0.381: U5.1 45.7,35.675 45.835,35.81 45.927,35.81 46.15,36.033 46.15,37.375 47.525,38.75 50.5,38.75 R16.1@52.5,38.75
NetS7_1: S7.1 S7.3 U2.16 U4.3 | length 45.8
  Top Layer w0.254: v1(28.812,20.621) 30.258,19.175 35.9,19.175 v1(36.875,20.15) ; v1(46.45,20.625) 46.45,20.712 48.538,22.8 50.301,22.8 50.45,22.949 ; 50.45,22.95 52.5,25 U2.16
  Top Layer w0.381: S7.1 25.65,34.7 28.315,32.034 28.315,31.334 28.45,31.2 28.584,31.334 29.209,31.334 v1(29.9,32.025)
  Bottom Layer w0.254: v1(28.812,20.621) 28.812,30.937 v1(29.9,32.025) ; v1(36.875,20.15) 36.95,20.15 37.425,20.625 v1(46.45,20.625)
NetU2_20: U2.20 U3.6 | length 85.6
  Top Layer w0.254: U3.6 6.55,33.384 5.144,31.978 5.128,31.978 2.65,29.5 2.65,12.675 5.15,10.175 18.575,10.175 21.025,12.625 v1(28.525,12.625) ; v1(32.036,12.621) 32.057,12.6 v1(43.4,12.6) ; v1(54.533,17.011) 56.5,18.978 U2.20
  Bottom Layer w0.254: v1@28.175,12.53 28.265,12.621 v1(32.036,12.621) ; v1(43.4,12.6) 50.122,12.6 v1(54.533,17.011)
NRST: C7.1 P2.5 S6.1 S6.3 U2.7 | length 77.8
  Top Layer w0.254: S6.3 4.575,36.275 6.875,36.275 v1(6.95,36.35) 7.025,36.275 9.625,36.275 S6.1 S6.1@11.625,38.275 ; S6.1@11.025,38.325 11.075,38.275 S6.1@11.625,38.275 ; P2.5@13.75,28.33 P2.5@13.75,28.385 ; v1@36.513,28.275 19.925,28.275 v1(19.9,28.25) 19.9,36.6 18.225,38.275 S6.1@11.625,38.275 ; v1(39.325,28.3) 39.475,28.3 41.75,30.575 v1(47.65,30.575) ; U2.7 54.987,29.5 v1(55.021,29.533)
  Bottom Layer w0.254: v1(6.95,36.35) 6.95,37.95 C7.1 ; P2.5@13.75,28.33 13.79,28.29 19.86,28.29 v1(19.9,28.25) ; v1@36.875,28.275 39.3,28.275 v1(39.325,28.3) ; v1(47.65,30.575) 47.65,30.6 50.9,33.85 53.925,33.85 55.1,32.675 55.1,29.613 v1(55.021,29.533)
  other v1: 36.85,28.3
NSS: P1.6 U2.33 | length 26
  Top Layer w0.254: U2.33 65,25 68.3,21.7 76.4,21.7 77.7,23 77.7,29.725 76.715,30.71 P1.6
SCK: P1.8 U2.34 | length 24.1
  Top Layer w0.254: U2.34 70.9,25.5 72,24.4 75.4,24.4 76.3,25.3 v1(76.3,29.3) ; P1.8 74.01,35.79 76.304,33.496 v1(76.304,32.126)
  Bottom Layer w0.254: v1(76.3,29.3) 76.304,29.304 v1(76.304,32.126)
SWCLK: P2.2 U2.49 | length 66.2
  Top Layer w0.254: P2.2@13.75,20.71 P2.2@13.755,20.705 ; v1(18.337,18.337) 20.415,16.26 v1(38.044,16.26) ; v1(42.825,16.175) 51.975,16.175 v1(52.8,17) ; v1(57.025,25.5) 56.975,25.55 56.975,31.675 58.225,32.925 61.825,32.925 62.5,33.6 U2.49
  Bottom Layer w0.254: P2.2@13.825,20.7 15.975,20.7 v1(18.337,18.337) ; v1(38.044,16.26) 38.044,16.131 39.4,14.775 41.676,14.775 42.825,15.924 v1(42.825,16.175) ; v1(52.8,17) 52.8,19.1 57.025,23.325 v1(57.025,25.5)
SWDIO: P2.4 U2.46 | length 55.8
  Top Layer w0.254: v1(21.375,26.8) 34.45,26.8 v1(34.575,26.925) ; v1(58.63,31.558) 58.688,31.5 U2.46
  Bottom Layer w0.254: P2.4@13.75,25.79 14.76,26.8 v1(21.375,26.8) ; v1(34.575,26.925) 34.7,26.8 40.1,26.8 42.412,29.112 46.15,32.85 47.925,32.85 49.725,34.65 55.076,34.65 ; 55.076,34.652 55.536,34.652 v1(58.63,31.558)
SWO: P2.6
USB_D_N: J1.2 U2.44 | length 11.7
  Top Layer w0.254: U2.44 64.458,30.492 67.083,30.492 68.029,31.438 68.029,36.042 68.029,39.079 J1.2@68.1,39.15
USB_D_P: J1.3 U2.45 | length 10.9
  Top Layer w0.254: U2.45@64.45,31.008 64.458,31 66.872,31 67.521,31.649 67.521,35.831 67.521,39.104 J1.3@67.45,39.175
Vbat: C5.2 C19.2 C21.2 P4.1 S7.2 S7.4 U1.4 U1.5 U4.1 U5.3 | length 51.7
  Top Layer w0.381: U4.1 38.125,29.3 ; S7.4@30.25,34.709 S7.4 ; S7.4@31.46,33.5 33.75,33.5 ; C19.2 33.39,37.75 33.75,37.39 33.75,33.5 ; P4.1 41,35.55 40.94,35.49 40.69,35.49 38.7,33.5 38.125,33.5 ; P4.1@41.105,35.5 41.115,35.49 42.385,35.49 v1@42.456,35.419 ; v1@42.456,35.49 U5.3@43.769,35.49 ; U5.3@43.769,35.419 U5.3 ; U1.5 U1.4 40.7,19.45 C5.2 40.15,19.6 38.9,19.6 38.125,20.375 38.125,29.3 ; 33.75,33.5 38.125,33.5 ; 38.125,29.3 38.125,33.5
  Bottom Layer w0.381: C21.2@41.15,33.5 41.51,33.86 42.47,34.82 42.47,35.37 v1(42.488,35.388)
VDD: C11.2 C12.2 C13.2 C14.2 C15.2 C16.2 L1.2 L2.2 L3.2 P1.2 P2.1 P3.1 R1.2 R2.2 R3.2 R4.2 S5.3 U2.19 U2.32 U2.48 U2.64 U3.4 U3.5 | length 210.4
  Top Layer w0.254: U2.64 C11.2@55,35.55 ; C12.2 55.998,21.148 55.998,21.723 56,21.725 U2.19 ; C12.2@55.575,21.15 C12.2@55.575,21.3 ; U2.48 64.554,32.5 64.575,32.521 C13.2@64.575,33.8 ; C13.2@64.95,33.7 C13.2@65,33.65
  Top Layer w0.381: U3.5 U3.4 8.5,33.55 17.15,33.55 ; P3.1 17.25,23.035 17.931,22.354 18.581,22.354 19.125,21.81 L3.2 ; L3.2@18.75,20.1 18.615,19.965 15.685,19.965 14.785,19.065 14.785,18.73 14.155,18.1 14.295,18.1 14.785,17.61 14.785,17.24 16.025,16 v1(19.2,16) ; L3.2@18.925,20.31 L3.2@18.925,20.75 ; L3.2@19.125,20.75 L3.2 ; R1.2@19.175,4.975 R1.2@19.175,5.075 ; v1(19.175,9.125) R1.2@19.175,5.075 ; 19.225,6.375 19.25,6.4 33.25,6.4 34.7,4.95 R2.2 34.8,4.95 36.25,6.4 48.5,6.4 49.95,4.95 R3.2 50.05,4.95 51.5,6.4 62.75,6.4 64.15,5 R4.2@64.25,5 ; R1.2@19.3,4.95 R1.2@19.175,5.075 ; v1(36.875,22.025) 32.45,22.025 C15.2 L1.2 26.475,21.9 23.575,21.9 L2.2 22.925,21.25 19.215,21.25 L3.2 ; v1(52.85,22.025) 52.85,19.75 53.578,19.022 54.328,19.022 v1(54.425,18.925) ; C11.2 54.859,36.56 54.859,37.231 55.375,37.746 v1(55.375,37.825) ; v1@54.702,19.175 55.216,19.689 55.216,20.366 C12.2 ; U2.32@62.54,22.848 63.227,22.848 v1(63.3,22.775) 63.3,22.672 63.575,22.397 63.575,21.25 C14.2@63.7,21.125 ; v1(63.325,34.45) 64.475,34.45 C13.2@64.55,34.525 ; C14.2@64.285,20.616 73.934,20.616 P1.2 76.6,20.55 78.625,22.575 78.625,34.835 S5.3
  Bottom Layer w0.381: v1(19.175,9.125) 19.188,9.138 19.188,15.988 v1(19.2,16) ; v1(36.875,22.025) v1(52.85,22.025) ; v1(54.425,18.925) 57.975,18.925 61.825,22.775 v1(63.3,22.775) 63.312,22.787 63.312,34.413 63.325,34.425 v1(63.325,34.45) 59.525,38.25 55.846,38.25 55.421,37.825 v1(55.375,37.825)
VDDA: C8.2 C9.2 C10.2 L1.1 L2.1 L3.1 U2.1 U2.13 | length 47.7
  Top Layer w0.254: v1(51.275,32.525) 51.291,32.509 52.713,32.509 52.725,32.521 C8.2 ; C9.2@51.3,26 51.3,26.25 51.55,26.5 U2.13
  Top Layer w0.381: L3.1 19.215,24.65 22.925,24.65 L2.1 ; L2.1@23.575,24.3 23.85,24.025 26.45,24.025 L1.1 C10.2 v1(36.675,23.7) ; v1(39.475,23.725) 40.3,24.55 49.475,24.55 v1(49.575,24.65) 49.815,24.65 50.391,25.225 50.391,25.64 50.75,26 C9.2@51.3,26
  Bottom Layer w0.381: v1(36.675,23.7) 39.45,23.7 v1(39.475,23.725) ; v1(49.575,24.65) 49.575,30.825 v1(51.275,32.525)
pads on no net: J1.4 P1.5 P1.9 P4.MP1 P4.MP2 U1.3 U2.2 U2.5 U2.6 U2.8 U2.9 U2.10 U2.11 U2.17 U2.24 U2.25 U2.26 U2.39 U2.40 U2.41 U2.42 U2.43 U2.50 U2.51 U2.52 U2.53 U2.54 U2.55 U2.56 U2.57 U2.58 U2.59 U2.61 U2.62 U3.3 U4.4

## Polygon pours and split planes (outlines as drawn)
GND on Bottom Layer "GND_L02_P000" (solid, pour order 0): 2,44 1,43 1,2 2,1 78,1 79,2 79,43 78,44

## Keep-outs
Keep-Out Layer:
  lines w0.25: 0.125,2.05 0.125,42.95 2.05,44.875 77.95,44.875 79.875,42.95 79.875,2.05 77.95,0.125 2.05,0.125 0.125,2.05

## Other copper
Top Layer:
  pour cut-out: 79.5,28
  pour cut-out: 72.75,42
Bottom Layer:
  pour cut-out: 79.25,26.25
  pour cut-out: 83.5,30.25

## Silkscreen, mask and mechanical layers (free items; w line width, h text height)
Bottom Overlay:
  text "W.A.T.C.H v1 / Kenneth Seneres / Zach Haviland" at 26.099,4.25 h1.52

## Text inside footprints (layer, text, board x,y; h text height)
U1: Mechanical 7 "0.114in/2.896mm" at 40.852,18.818 h0.76 r180; Mechanical 7 "3.740157E-02in/.95mm" at 54.995,18.343 h0.76 r180
U3: Mechanical 7 "0.114in/2.896mm" at 7.818,36.648 h0.76 r90; Mechanical 7 "0.063in/1.6mm" at 3.004,30.186 h0.76 r90; Mechanical 7 "3.740157E-02in/.95mm" at 7.342,22.505 h0.76 r90